# EAGLE board PLAN2 FINAL2 (EAGLE 9.3.0)
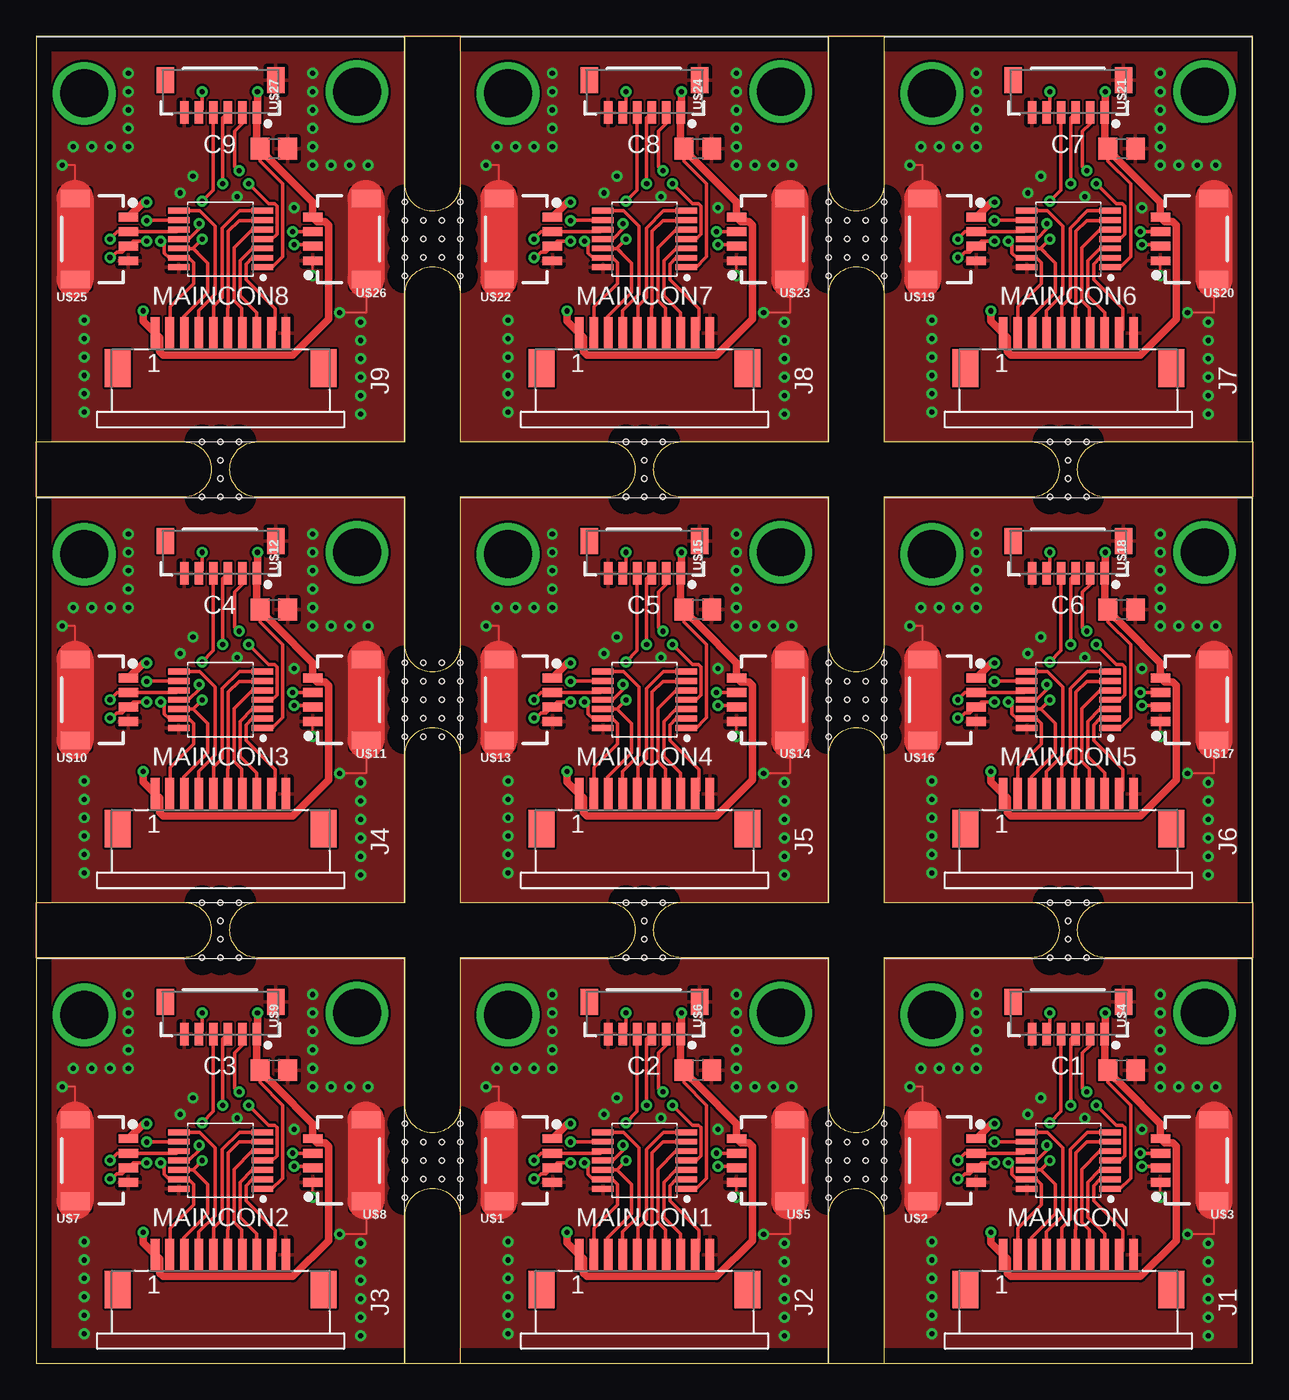
[diagram p0: board, top side]
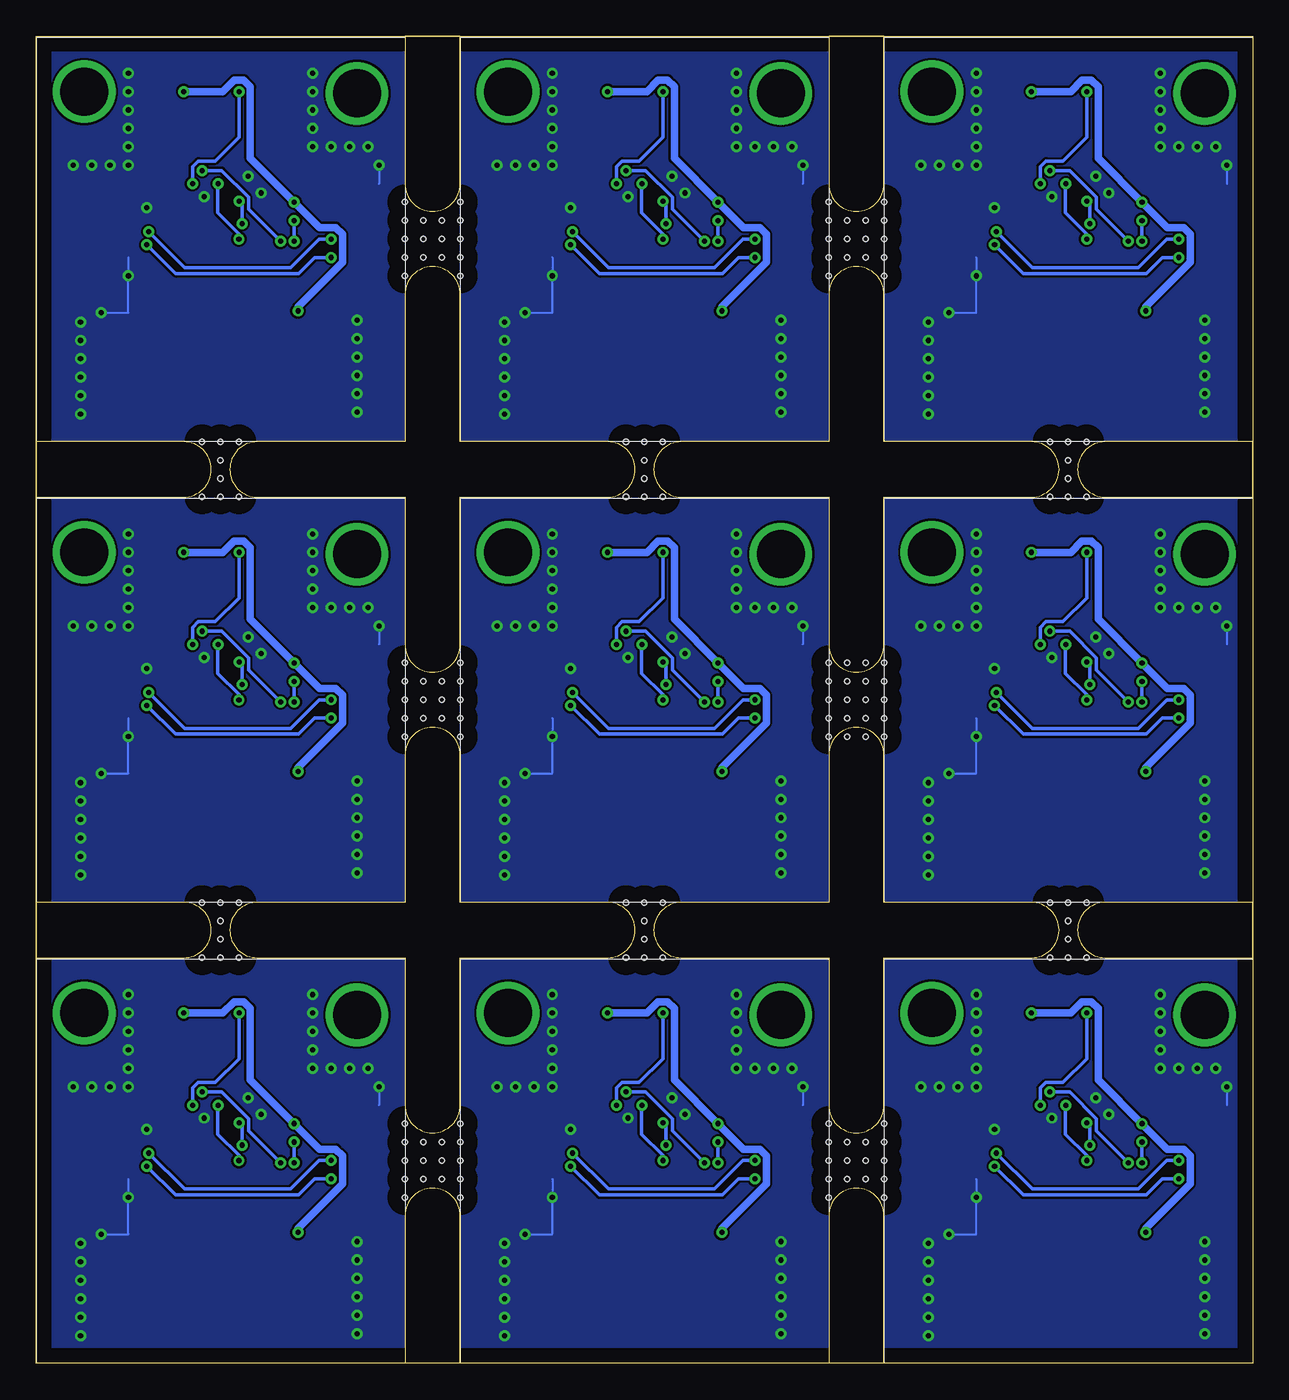
[diagram p1: board, bottom side, seen from below]

Size 83.82 x 91.44 mm. Coordinates in mm from the lower left corner, seen from the top.
Outline: 0,0 83.82,0 83.82,91.44 0,91.44 0,0
Copper layers (1*16): Top 0.035mm / dielectric 1.5mm / Bottom 0.035mm
Design rules "default": minimum track width 6mil, minimum drill 0.35mm, track to track 6mil, track to pad 6mil, pad to pad 6mil, via to via 6mil, smd to smd 6mil, copper to edge 40mil, drill to drill 6mil, minimum pad ring 10mil, minimum via ring 8mil, stop-mask expansion 4mil, vias tented up to drill 0mil, thermal gap 10mil
Holes 0.35 mm at 54.61,48.26 54.61,46.99 54.61,45.72 54.61,44.45 54.61,43.18 58.42,48.26 58.42,46.99 58.42,45.72 58.42,44.45 58.42,43.18 55.88,46.99 55.88,45.72 55.88,44.45 57.15,46.99 57.15,45.72 57.15,44.45 54.61,16.51 54.61,15.24 54.61,13.97 54.61,12.7 54.61,11.43 55.88,15.24 55.88,13.97 55.88,12.7 57.15,15.24 57.15,13.97 57.15,12.7 58.42,16.51 58.42,15.24 58.42,13.97 58.42,12.7 58.42,11.43 25.4,16.51 25.4,15.24 25.4,13.97 25.4,12.7 25.4,11.43 26.67,15.24 26.67,13.97 26.67,12.7 27.94,15.24 27.94,13.97 27.94,12.7 29.21,16.51 29.21,15.24 29.21,13.97 29.21,12.7 29.21,11.43 11.43,31.75 12.7,31.75 13.97,31.75 12.7,30.48 12.7,29.21 11.43,27.94 12.7,27.94 13.97,27.94 40.64,31.75 41.91,31.75 43.18,31.75 41.91,30.48 41.91,29.21 40.64,27.94 41.91,27.94 43.18,27.94 69.85,31.75 71.12,31.75 72.39,31.75 71.12,30.48 71.12,29.21 69.85,27.94 71.12,27.94 72.39,27.94 25.4,48.26 25.4,46.99 25.4,45.72 25.4,44.45 25.4,43.18 26.67,48.26 26.67,46.99 26.67,45.72 26.67,44.45 26.67,43.18 27.94,48.26 27.94,46.99 27.94,45.72 27.94,44.45 27.94,43.18 29.21,48.26 29.21,46.99 29.21,45.72 29.21,44.45 29.21,43.18 25.4,80.01 25.4,78.74 25.4,77.47 25.4,76.2 25.4,74.93 26.67,78.74 26.67,77.47 26.67,76.2 27.94,78.74 27.94,77.47 27.94,76.2 29.21,80.01 29.21,78.74 29.21,77.47 29.21,76.2 29.21,74.93 54.61,80.01 54.61,78.74 54.61,77.47 54.61,76.2 54.61,74.93 55.88,78.74 55.88,77.47 55.88,76.2 57.15,78.74 57.15,77.47 57.15,76.2 58.42,80.01 58.42,78.74 58.42,77.47 58.42,76.2 58.42,74.93 11.43,63.5 12.7,63.5 13.97,63.5 12.7,62.23 12.7,60.96 11.43,59.69 12.7,59.69 13.97,59.69 40.64,63.5 41.91,63.5 43.18,63.5 41.91,62.23 41.91,60.96 40.64,59.69 41.91,59.69 43.18,59.69 69.85,63.5 71.12,63.5 72.39,63.5 71.12,62.23 71.12,60.96 69.85,59.69 71.12,59.69 72.39,59.69
Milling: 80 lines

## Footprints (pad centres in the part's own frame; a part is rotated, then mirrored left to right if it is on the bottom)
C0805 = smd 1.3 x 1.5: 1 -0.95,0; 2 0.95,0
68611014422 = smd 0.6 x 2.2: 1 -4.5,2.4; 2 -3.5,2.4; 3 -2.5,2.4; 4 -1.5,2.4; 5 -0.5,2.4; 6 0.5,2.4; 7 1.5,2.4; 8 2.5,2.4; 9 3.5,2.4; 10 4.5,2.4 | smd 1.8 x 2.6: Z1 -7.1,0; Z2 7.1,0
14-TSSOP = smd 1.469 x 0.407: 1 -2.871,1.95; 2 -2.871,1.3; 3 -2.871,0.65; 4 -2.871,0; 5 -2.871,-0.65; 6 -2.871,-1.3; 7 -2.871,-1.95; 8 2.871,-1.95; 9 2.871,-1.3; 10 2.871,-0.65; 11 2.871,0; 12 2.871,0.65; 13 2.871,1.3; 14 2.871,1.95
JST_ZH_4PIN = smd 0.6 x 1.35: 1 -1.5,0; 2 -0.5,0; 3 0.5,0; 4 1.5,0 | smd 1.2 x 2: NC1 2.8,-3.675; NC2 -2.8,-3.675
JST_ZH_6PIN = smd 0.6 x 1.55: 1 -2.5,1.45; 2 -1.5,1.45; 3 -0.5,1.45; 4 0.5,1.45; 5 1.5,1.45; 6 2.5,1.45 | smd 1.2 x 1.8: P$1 -3.8,-0.775; P$2 3.8,-0.775

## Placement (x,y rotation side)
C1  47u  [C0805]  74.8,20.19 0 top
C2  47u  [C0805]  45.59,20.19 0 top
C3  47u  [C0805]  16.38,20.19 0 top
C4  47u  [C0805]  16.38,51.94 0 top
C5  47u  [C0805]  45.59,51.94 0 top
C6  47u  [C0805]  74.8,51.94 0 top
C7  47u  [C0805]  74.8,83.69 0 top
C8  47u  [C0805]  45.59,83.69 0 top
C9  47u  [C0805]  16.38,83.69 0 top
J1  analog  [68611014422]  71.12,5.08 0 top
J2  analog  [68611014422]  41.91,5.08 0 top
J3  analog  [68611014422]  12.7,5.08 0 top
J4  analog  [68611014422]  12.7,36.83 0 top
J5  analog  [68611014422]  41.91,36.83 0 top
J6  analog  [68611014422]  71.12,36.83 0 top
J7  analog  [68611014422]  71.12,68.58 0 top
J8  analog  [68611014422]  41.91,68.58 0 top
J9  analog  [68611014422]  12.7,68.58 0 top
MAINCON  PIC16F18424  [14-TSSOP]  71.12,13.97 180 top
MAINCON1  PIC16F18424  [14-TSSOP]  41.91,13.97 180 top
MAINCON2  PIC16F18424  [14-TSSOP]  12.7,13.97 180 top
MAINCON3  PIC16F18424  [14-TSSOP]  12.7,45.72 180 top
MAINCON4  PIC16F18424  [14-TSSOP]  41.91,45.72 180 top
MAINCON5  PIC16F18424  [14-TSSOP]  71.12,45.72 180 top
MAINCON6  PIC16F18424  [14-TSSOP]  71.12,77.47 180 top
MAINCON7  PIC16F18424  [14-TSSOP]  41.91,77.47 180 top
MAINCON8  PIC16F18424  [14-TSSOP]  12.7,77.47 180 top
U$1  IIC1  [JST_ZH_4PIN]  35.56,13.97 270 top
U$2  IIC1  [JST_ZH_4PIN]  64.77,13.97 270 top
U$3  IIC2  [JST_ZH_4PIN]  77.47,13.97 90 top
U$4  programming  [JST_ZH_6PIN]  71.12,24.13 180 top
U$5  IIC2  [JST_ZH_4PIN]  48.26,13.97 90 top
U$6  programming  [JST_ZH_6PIN]  41.91,24.13 180 top
U$7  IIC1  [JST_ZH_4PIN]  6.35,13.97 270 top
U$8  IIC2  [JST_ZH_4PIN]  19.05,13.97 90 top
U$9  programming  [JST_ZH_6PIN]  12.7,24.13 180 top
U$10  IIC1  [JST_ZH_4PIN]  6.35,45.72 270 top
U$11  IIC2  [JST_ZH_4PIN]  19.05,45.72 90 top
U$12  programming  [JST_ZH_6PIN]  12.7,55.88 180 top
U$13  IIC1  [JST_ZH_4PIN]  35.56,45.72 270 top
U$14  IIC2  [JST_ZH_4PIN]  48.26,45.72 90 top
U$15  programming  [JST_ZH_6PIN]  41.91,55.88 180 top
U$16  IIC1  [JST_ZH_4PIN]  64.77,45.72 270 top
U$17  IIC2  [JST_ZH_4PIN]  77.47,45.72 90 top
U$18  programming  [JST_ZH_6PIN]  71.12,55.88 180 top
U$19  IIC1  [JST_ZH_4PIN]  64.77,77.47 270 top
U$20  IIC2  [JST_ZH_4PIN]  77.47,77.47 90 top
U$21  programming  [JST_ZH_6PIN]  71.12,87.63 180 top
U$22  IIC1  [JST_ZH_4PIN]  35.56,77.47 270 top
U$23  IIC2  [JST_ZH_4PIN]  48.26,77.47 90 top
U$24  programming  [JST_ZH_6PIN]  41.91,87.63 180 top
U$25  IIC1  [JST_ZH_4PIN]  6.35,77.47 270 top
U$26  IIC2  [JST_ZH_4PIN]  19.05,77.47 90 top
U$27  programming  [JST_ZH_6PIN]  12.7,87.63 180 top

## Library data of the parts
C1-C9 = rcl; SPICEPREFIX: C
J1-J9 = Wurth_Elektronik_Electromechanic_FPC_Connectors_&_Flat_Flexible_Cable_rev18c
MAINCON MAINCON1-MAINCON8 = ORBiT-IC-PIC
U$1-U$27 = ORBiT-con-JST

## Nets
+5V: C1.1 J1.1 MAINCON.1 U$2.1 U$3.4 U$4.1
+5V1: C2.1 J2.1 MAINCON1.1 U$1.1 U$5.4 U$6.1
+5V2: C3.1 J3.1 MAINCON2.1 U$7.1 U$8.4 U$9.1
+5V3: C4.1 J4.1 MAINCON3.1 U$10.1 U$11.4 U$12.1
+5V4: C5.1 J5.1 MAINCON4.1 U$13.1 U$14.4 U$15.1
+5V5: C6.1 J6.1 MAINCON5.1 U$16.1 U$17.4 U$18.1
+5V6: C7.1 J7.1 MAINCON6.1 U$19.1 U$20.4 U$21.1
+5V7: C8.1 J8.1 MAINCON7.1 U$22.1 U$23.4 U$24.1
+5V8: C9.1 J9.1 MAINCON8.1 U$25.1 U$26.4 U$27.1
AD1: J1.2 MAINCON.13 U$4.2
AD2: J1.3 MAINCON.12 U$4.3
AD3: J1.4 MAINCON.8
AD4: J1.5 MAINCON.7
AD5: J1.6 MAINCON.6
AD6: J1.7 MAINCON.5
AD7: J1.8 MAINCON.3
AD8: J1.9 MAINCON.2
AD9: J2.4 MAINCON1.8
AD10: J2.5 MAINCON1.7
AD11: J2.6 MAINCON1.6
AD12: J2.7 MAINCON1.5
AD13: J2.8 MAINCON1.3
AD14: J2.9 MAINCON1.2
AD15: J2.2 MAINCON1.13 U$6.2
AD16: J2.3 MAINCON1.12 U$6.3
AD17: J3.4 MAINCON2.8
AD18: J3.5 MAINCON2.7
AD19: J3.6 MAINCON2.6
AD20: J3.7 MAINCON2.5
AD21: J3.8 MAINCON2.3
AD22: J3.9 MAINCON2.2
AD23: J3.2 MAINCON2.13 U$9.2
AD24: J3.3 MAINCON2.12 U$9.3
AD25: J4.4 MAINCON3.8
AD26: J4.5 MAINCON3.7
AD27: J4.6 MAINCON3.6
AD28: J4.7 MAINCON3.5
AD29: J4.8 MAINCON3.3
AD30: J4.9 MAINCON3.2
AD31: J4.2 MAINCON3.13 U$12.2
AD32: J4.3 MAINCON3.12 U$12.3
AD33: J5.4 MAINCON4.8
AD34: J5.5 MAINCON4.7
AD35: J5.6 MAINCON4.6
AD36: J5.7 MAINCON4.5
AD37: J5.8 MAINCON4.3
AD38: J5.9 MAINCON4.2
AD39: J5.2 MAINCON4.13 U$15.2
AD40: J5.3 MAINCON4.12 U$15.3
AD41: J6.4 MAINCON5.8
AD42: J6.5 MAINCON5.7
AD43: J6.6 MAINCON5.6
AD44: J6.7 MAINCON5.5
AD45: J6.8 MAINCON5.3
AD46: J6.9 MAINCON5.2
AD47: J6.2 MAINCON5.13 U$18.2
AD48: J6.3 MAINCON5.12 U$18.3
AD49: J7.4 MAINCON6.8
AD50: J7.5 MAINCON6.7
AD51: J7.6 MAINCON6.6
AD52: J7.7 MAINCON6.5
AD53: J7.8 MAINCON6.3
AD54: J7.9 MAINCON6.2
AD55: J7.2 MAINCON6.13 U$21.2
AD56: J7.3 MAINCON6.12 U$21.3
AD57: J8.4 MAINCON7.8
AD58: J8.5 MAINCON7.7
AD59: J8.6 MAINCON7.6
AD60: J8.7 MAINCON7.5
AD61: J8.8 MAINCON7.3
AD62: J8.9 MAINCON7.2
AD63: J8.2 MAINCON7.13 U$24.2
AD64: J8.3 MAINCON7.12 U$24.3
AD65: J9.4 MAINCON8.8
AD66: J9.5 MAINCON8.7
AD67: J9.6 MAINCON8.6
AD68: J9.7 MAINCON8.5
AD69: J9.8 MAINCON8.3
AD70: J9.9 MAINCON8.2
AD71: J9.2 MAINCON8.13 U$27.2
AD72: J9.3 MAINCON8.12 U$27.3
GND: C1.2 J1.10 MAINCON.14 U$2.4 U$2.NC1 U$2.NC2 U$3.1 U$3.NC1 U$3.NC2 U$4.6 U$4.P$1
GND1: C2.2 J2.10 MAINCON1.14 U$1.4 U$1.NC1 U$1.NC2 U$5.1 U$5.NC1 U$5.NC2 U$6.6 U$6.P$1
GND2: C3.2 J3.10 MAINCON2.14 U$7.4 U$7.NC1 U$7.NC2 U$8.1 U$8.NC1 U$8.NC2 U$9.6 U$9.P$1
GND3: C4.2 J4.10 MAINCON3.14 U$10.4 U$10.NC1 U$10.NC2 U$11.1 U$11.NC1 U$11.NC2 U$12.6 U$12.P$1
GND4: C5.2 J5.10 MAINCON4.14 U$13.4 U$13.NC1 U$13.NC2 U$14.1 U$14.NC1 U$14.NC2 U$15.6 U$15.P$1
GND5: C6.2 J6.10 MAINCON5.14 U$16.4 U$16.NC1 U$16.NC2 U$17.1 U$17.NC1 U$17.NC2 U$18.6 U$18.P$1
GND6: C7.2 J7.10 MAINCON6.14 U$19.4 U$19.NC1 U$19.NC2 U$20.1 U$20.NC1 U$20.NC2 U$21.6 U$21.P$1
GND7: C8.2 J8.10 MAINCON7.14 U$22.4 U$22.NC1 U$22.NC2 U$23.1 U$23.NC1 U$23.NC2 U$24.6 U$24.P$1
GND8: C9.2 J9.10 MAINCON8.14 U$25.4 U$25.NC1 U$25.NC2 U$26.1 U$26.NC1 U$26.NC2 U$27.6 U$27.P$1
N$3: MAINCON1.11 U$6.4
N$4: MAINCON1.4 U$6.5
N$7: MAINCON.11 U$4.4
N$8: MAINCON.4 U$4.5
N$9: MAINCON2.11 U$9.4
N$10: MAINCON2.4 U$9.5
N$13: MAINCON3.11 U$12.4
N$14: MAINCON3.4 U$12.5
N$17: MAINCON4.11 U$15.4
N$18: MAINCON4.4 U$15.5
N$21: MAINCON5.11 U$18.4
N$22: MAINCON5.4 U$18.5
N$25: MAINCON6.11 U$21.4
N$26: MAINCON6.4 U$21.5
N$29: MAINCON7.11 U$24.4
N$30: MAINCON7.4 U$24.5
N$33: MAINCON8.11 U$27.4
N$34: MAINCON8.4 U$27.5
SCL: MAINCON.10 U$2.2 U$3.3
SCL1: MAINCON1.10 U$1.2 U$5.3
SCL2: MAINCON2.10 U$7.2 U$8.3
SCL3: MAINCON3.10 U$10.2 U$11.3
SCL4: MAINCON4.10 U$13.2 U$14.3
SCL5: MAINCON5.10 U$16.2 U$17.3
SCL6: MAINCON6.10 U$19.2 U$20.3
SCL7: MAINCON7.10 U$22.2 U$23.3
SCL8: MAINCON8.10 U$25.2 U$26.3
SDA: MAINCON.9 U$2.3 U$3.2
SDA1: MAINCON1.9 U$1.3 U$5.2
SDA2: MAINCON2.9 U$7.3 U$8.2
SDA3: MAINCON3.9 U$10.3 U$11.2
SDA4: MAINCON4.9 U$13.3 U$14.2
SDA5: MAINCON5.9 U$16.3 U$17.2
SDA6: MAINCON6.9 U$19.3 U$20.2
SDA7: MAINCON7.9 U$22.3 U$23.2
SDA8: MAINCON8.9 U$25.3 U$26.2

## Tracks (layer width: path | path; a pad name or v marks a point on that pad's centre or on a via)
+5V  (via drill 0.35)
  Top 0.254: MAINCON.1 74.08,11.93 74.59,11.93 75.41,12.76 75.41,17.78 73.85,19.34 C1.1
  Top 0.508: U$2.1 65.81,16.51 v66.04,16.51 | v73.66,24.13 73.66,22.72 U$4.1 73.62,20.14 73.85,19.91 C1.1 73.85,20.12 74.02,19.95 74.94,19.04 77.47,16.51 U$3.4 77.76,15.18 78.31,15.18 78.55,14.94 78.55,8.44 76.09,5.97 67.15,5.97 66.91,6.21 66.91,7.19 J1.1 65.79,8.31 v65.79,9.02
  Bottom 0.508: v73.66,24.13 70.96,24.13 70.17,24.91 69.53,24.91 69.06,24.45 69.06,19.54 v66.04,16.51 64.28,14.76 63.17,14.76 62.72,14.29 62.72,12.38 65.79,9.3 v65.79,9.02
+5V1  (via drill 0.35)
  Top 0.254: MAINCON1.1 44.87,11.93 45.38,11.93 46.2,12.76 46.2,17.78 44.64,19.34 C2.1
  Top 0.508: U$1.1 36.6,16.51 v36.83,16.51 | v44.45,24.13 44.45,22.72 U$6.1 44.41,20.14 44.64,19.91 C2.1 44.64,20.12 44.81,19.95 45.73,19.04 48.26,16.51 U$5.4 48.55,15.18 49.1,15.18 49.34,14.94 49.34,8.44 46.88,5.97 37.94,5.97 37.7,6.21 37.7,7.19 J2.1 36.58,8.31 v36.58,9.02
  Bottom 0.508: v44.45,24.13 41.75,24.13 40.97,24.91 40.31,24.91 39.85,24.45 39.85,19.54 v36.83,16.51 35.08,14.76 33.97,14.76 33.51,14.29 33.51,12.38 36.58,9.3 v36.58,9.02
+5V2  (via drill 0.35)
  Top 0.254: MAINCON2.1 15.66,11.93 16.17,11.93 16.99,12.76 16.99,17.78 15.43,19.34 C3.1
  Top 0.508: U$7.1 7.39,16.51 v7.62,16.51 | v15.24,24.13 15.24,22.72 U$9.1 15.2,20.14 15.43,19.91 C3.1 15.43,20.12 15.6,19.95 16.52,19.04 19.05,16.51 U$8.4 19.34,15.18 19.89,15.18 20.13,14.94 20.13,8.44 17.67,5.97 8.73,5.97 8.49,6.21 8.49,7.19 J3.1 7.37,8.31 v7.37,9.02
  Bottom 0.508: v15.24,24.13 12.54,24.13 11.76,24.91 11.11,24.91 10.64,24.45 10.64,19.54 v7.62,16.51 5.87,14.76 4.75,14.76 4.29,14.29 4.29,12.38 7.37,9.3 v7.37,9.02
+5V3  (via drill 0.35)
  Top 0.254: MAINCON3.1 15.66,43.68 16.17,43.68 16.99,44.51 16.99,49.53 15.43,51.09 C4.1
  Top 0.508: U$10.1 7.39,48.26 v7.62,48.26 | v15.24,55.88 15.24,54.47 U$12.1 15.2,51.89 15.43,51.66 C4.1 15.43,51.87 15.6,51.7 16.52,50.79 19.05,48.26 U$11.4 19.34,46.93 19.89,46.93 20.13,46.69 20.13,40.19 17.67,37.72 8.73,37.72 8.49,37.96 8.49,38.94 J4.1 7.37,40.06 v7.37,40.77
  Bottom 0.508: v15.24,55.88 12.54,55.88 11.76,56.66 11.11,56.66 10.64,56.2 10.64,51.28 v7.62,48.26 5.87,46.51 4.75,46.51 4.29,46.05 4.29,44.12 7.37,41.05 v7.37,40.77
+5V4  (via drill 0.35)
  Top 0.254: MAINCON4.1 44.87,43.68 45.38,43.68 46.2,44.51 46.2,49.53 44.64,51.09 C5.1
  Top 0.508: U$13.1 36.6,48.26 v36.83,48.26 | v44.45,55.88 44.45,54.47 U$15.1 44.41,51.89 44.64,51.66 C5.1 44.64,51.87 44.81,51.7 45.73,50.79 48.26,48.26 U$14.4 48.55,46.93 49.1,46.93 49.34,46.69 49.34,40.19 46.88,37.72 37.94,37.72 37.7,37.96 37.7,38.94 J5.1 36.58,40.06 v36.58,40.77
  Bottom 0.508: v44.45,55.88 41.75,55.88 40.97,56.66 40.31,56.66 39.85,56.2 39.85,51.28 v36.83,48.26 35.08,46.51 33.97,46.51 33.51,46.05 33.51,44.12 36.58,41.05 v36.58,40.77
+5V5  (via drill 0.35)
  Top 0.254: MAINCON5.1 74.08,43.68 74.59,43.68 75.41,44.51 75.41,49.53 73.85,51.09 C6.1
  Top 0.508: U$16.1 65.81,48.26 v66.04,48.26 | v73.66,55.88 73.66,54.47 U$18.1 73.62,51.89 73.85,51.66 C6.1 73.85,51.87 74.02,51.7 74.94,50.79 77.47,48.26 U$17.4 77.76,46.93 78.31,46.93 78.55,46.69 78.55,40.19 76.09,37.72 67.15,37.72 66.91,37.96 66.91,38.94 J6.1 65.79,40.06 v65.79,40.77
  Bottom 0.508: v73.66,55.88 70.96,55.88 70.17,56.66 69.53,56.66 69.06,56.2 69.06,51.28 v66.04,48.26 64.28,46.51 63.17,46.51 62.72,46.05 62.72,44.12 65.79,41.05 v65.79,40.77
+5V6  (via drill 0.35)
  Top 0.254: MAINCON6.1 74.08,75.43 74.59,75.43 75.41,76.26 75.41,81.28 73.85,82.84 C7.1
  Top 0.508: U$19.1 65.81,80.01 v66.04,80.01 | v73.66,87.63 73.66,86.22 U$21.1 73.62,83.64 73.85,83.41 C7.1 73.85,83.62 74.02,83.45 74.94,82.54 77.47,80.01 U$20.4 77.76,78.68 78.31,78.68 78.55,78.44 78.55,71.94 76.09,69.47 67.15,69.47 66.91,69.71 66.91,70.69 J7.1 65.79,71.81 v65.79,72.52
  Bottom 0.508: v73.66,87.63 70.96,87.63 70.17,88.42 69.53,88.42 69.06,87.95 69.06,83.03 v66.04,80.01 64.28,78.25 63.17,78.25 62.72,77.8 62.72,75.88 65.79,72.8 v65.79,72.52
+5V7  (via drill 0.35)
  Top 0.254: MAINCON7.1 44.87,75.43 45.38,75.43 46.2,76.26 46.2,81.28 44.64,82.84 C8.1
  Top 0.508: U$22.1 36.6,80.01 v36.83,80.01 | v44.45,87.63 44.45,86.22 U$24.1 44.41,83.64 44.64,83.41 C8.1 44.64,83.62 44.81,83.45 45.73,82.54 48.26,80.01 U$23.4 48.55,78.68 49.1,78.68 49.34,78.44 49.34,71.94 46.88,69.47 37.94,69.47 37.7,69.71 37.7,70.69 J8.1 36.58,71.81 v36.58,72.52
  Bottom 0.508: v44.45,87.63 41.75,87.63 40.97,88.42 40.31,88.42 39.85,87.95 39.85,83.03 v36.83,80.01 35.08,78.25 33.97,78.25 33.51,77.8 33.51,75.88 36.58,72.8 v36.58,72.52
+5V8  (via drill 0.35)
  Top 0.254: MAINCON8.1 15.66,75.43 16.17,75.43 16.99,76.26 16.99,81.28 15.43,82.84 C9.1
  Top 0.508: U$25.1 7.39,80.01 v7.62,80.01 | v15.24,87.63 15.24,86.22 U$27.1 15.2,83.64 15.43,83.41 C9.1 15.43,83.62 15.6,83.45 16.52,82.54 19.05,80.01 U$26.4 19.34,78.68 19.89,78.68 20.13,78.44 20.13,71.94 17.67,69.47 8.73,69.47 8.49,69.71 8.49,70.69 J9.1 7.37,71.81 v7.37,72.52
  Bottom 0.508: v15.24,87.63 12.54,87.63 11.76,88.42 11.11,88.42 10.64,87.95 10.64,83.03 v7.62,80.01 5.87,78.25 4.75,78.25 4.29,77.8 4.29,75.88 7.37,72.8 v7.37,72.52
AD1  (via drill 0.35)
  Top 0.254: J1.2 67.66,7.52 67.66,9.31 69.26,10.91 69.26,12.34 68.93,12.67 MAINCON.13 67.57,12.67 67.23,13 67.23,13.68 67.11,13.81 v66.98,13.81 | v72.39,18.69 72.34,18.69 72.09,18.94 72.09,21.38 72.62,21.91 U$4.2
  Bottom 0.254: v66.98,13.81 69.19,16.02 69.19,16.85 71.03,18.69 v72.39,18.69
AD2  (via drill 0.35)
  Top 0.254: 69.85,12.7 69.23,13.32 68.58,13.32 MAINCON.12 | 69.85,12.7 69.22,13.33 v69.86,13.96 | 69.85,12.7 70.23,12.32 70.23,10.29 68.58,8.64 68.58,7.52 J1.3 | v71.28,17.78 71.28,22.34 U$4.3
  Bottom 0.254: v69.86,13.96 69.86,14.32 71.31,15.77 71.31,17.78 v71.28,17.78
AD3
  Top 0.254: J1.4 69.62,9.04 70.74,10.16 70.74,14.86 69.68,15.92 MAINCON.8
AD4
  Top 0.254: J1.5 70.66,7.52 70.66,9.33 71.25,9.92 71.25,14.73 72.44,15.92 MAINCON.7
AD5
  Top 0.254: MAINCON.6 73.96,15.24 72.39,15.24 71.65,14.5 71.65,9.24 71.62,9.21 J1.6
AD6
  Top 0.254: J1.7 72.58,7.52 72.58,9.2 72.06,9.72 72.06,13.37 73.31,14.62 MAINCON.5
AD7
  Top 0.254: J1.8 73.62,8.91 72.47,10.06 72.47,12.48 73.31,13.32 MAINCON.3
AD8
  Top 0.254: MAINCON.2 73.31,12.67 72.87,12.23 72.87,11.18 74.87,9.18 74.87,7.73 J1.9
AD9
  Top 0.254: J2.4 40.41,9.04 41.53,10.16 41.53,14.86 40.47,15.92 MAINCON1.8
AD10
  Top 0.254: J2.5 41.45,7.52 41.45,9.33 42.04,9.92 42.04,14.73 43.23,15.92 MAINCON1.7
AD11
  Top 0.254: MAINCON1.6 44.75,15.24 43.18,15.24 42.44,14.5 42.44,9.24 42.41,9.21 J2.6
AD12
  Top 0.254: J2.7 43.37,7.52 43.37,9.2 42.85,9.72 42.85,13.37 44.1,14.62 MAINCON1.5
AD13
  Top 0.254: J2.8 44.41,8.91 43.26,10.06 43.26,12.48 44.1,13.32 MAINCON1.3
AD14
  Top 0.254: MAINCON1.2 44.1,12.67 43.66,12.23 43.66,11.18 45.66,9.18 45.66,7.73 J2.9
AD15  (via drill 0.35)
  Top 0.254: J2.2 38.45,7.52 38.45,9.31 40.05,10.91 40.05,12.34 39.72,12.67 MAINCON1.13 38.36,12.67 38.02,13 38.02,13.68 37.9,13.81 v37.77,13.81 | v43.18,18.69 43.13,18.69 42.88,18.94 42.88,21.38 43.41,21.91 U$6.2
  Bottom 0.254: v37.77,13.81 39.98,16.02 39.98,16.85 41.82,18.69 v43.18,18.69
AD16  (via drill 0.35)
  Top 0.254: 40.64,12.7 40.02,13.32 39.37,13.32 MAINCON1.12 | 40.64,12.7 40.01,13.33 v40.65,13.96 | 40.64,12.7 41.02,12.32 41.02,10.29 39.37,8.64 39.37,7.52 J2.3 | v42.07,17.78 42.07,22.34 U$6.3
  Bottom 0.254: v40.65,13.96 40.65,14.32 42.1,15.77 42.1,17.78 v42.07,17.78
AD17
  Top 0.254: J3.4 11.2,9.04 12.32,10.16 12.32,14.86 11.26,15.92 MAINCON2.8
AD18
  Top 0.254: J3.5 12.24,7.52 12.24,9.33 12.83,9.92 12.83,14.73 14.02,15.92 MAINCON2.7
AD19
  Top 0.254: MAINCON2.6 15.54,15.24 13.97,15.24 13.23,14.5 13.23,9.24 13.2,9.21 J3.6
AD20
  Top 0.254: J3.7 14.16,7.52 14.16,9.2 13.64,9.72 13.64,13.37 14.89,14.62 MAINCON2.5
AD21
  Top 0.254: J3.8 15.2,8.91 14.05,10.06 14.05,12.48 14.89,13.32 MAINCON2.3
AD22
  Top 0.254: MAINCON2.2 14.89,12.67 14.45,12.23 14.45,11.18 16.45,9.18 16.45,7.73 J3.9
AD23  (via drill 0.35)
  Top 0.254: J3.2 9.24,7.52 9.24,9.31 10.84,10.91 10.84,12.34 10.51,12.67 MAINCON2.13 9.15,12.67 8.81,13 8.81,13.68 8.69,13.81 v8.56,13.81 | v13.97,18.69 13.92,18.69 13.67,18.94 13.67,21.38 14.2,21.91 U$9.2
  Bottom 0.254: v8.56,13.81 10.77,16.02 10.77,16.85 12.61,18.69 v13.97,18.69
AD24  (via drill 0.35)
  Top 0.254: 11.43,12.7 10.81,13.32 10.16,13.32 MAINCON2.12 | 11.43,12.7 10.8,13.33 v11.44,13.96 | 11.43,12.7 11.81,12.32 11.81,10.29 10.16,8.64 10.16,7.52 J3.3 | v12.86,17.78 12.86,22.34 U$9.3
  Bottom 0.254: v11.44,13.96 11.44,14.32 12.89,15.77 12.89,17.78 v12.86,17.78
AD25
  Top 0.254: J4.4 11.2,40.79 12.32,41.91 12.32,46.61 11.26,47.67 MAINCON3.8
AD26
  Top 0.254: J4.5 12.24,39.27 12.24,41.08 12.83,41.67 12.83,46.48 14.02,47.67 MAINCON3.7
AD27
  Top 0.254: MAINCON3.6 15.54,46.99 13.97,46.99 13.23,46.25 13.23,40.99 13.2,40.96 J4.6
AD28
  Top 0.254: J4.7 14.16,39.27 14.16,40.95 13.64,41.47 13.64,45.12 14.89,46.37 MAINCON3.5
AD29
  Top 0.254: J4.8 15.2,40.66 14.05,41.81 14.05,44.23 14.89,45.07 MAINCON3.3
AD30
  Top 0.254: MAINCON3.2 14.89,44.42 14.45,43.98 14.45,42.93 16.45,40.92 16.45,39.48 J4.9
AD31  (via drill 0.35)
  Top 0.254: J4.2 9.24,39.27 9.24,41.06 10.84,42.66 10.84,44.09 10.51,44.42 MAINCON3.13 9.15,44.42 8.81,44.75 8.81,45.43 8.69,45.56 v8.56,45.56 | v13.97,50.44 13.92,50.44 13.67,50.69 13.67,53.13 14.2,53.66 U$12.2
  Bottom 0.254: v8.56,45.56 10.77,47.77 10.77,48.6 12.61,50.44 v13.97,50.44
AD32  (via drill 0.35)
  Top 0.254: 11.43,44.45 10.81,45.07 10.16,45.07 MAINCON3.12 | 11.43,44.45 10.8,45.08 v11.44,45.71 | 11.43,44.45 11.81,44.07 11.81,42.04 10.16,40.39 10.16,39.27 J4.3 | v12.86,49.53 12.86,54.09 U$12.3
  Bottom 0.254: v11.44,45.71 11.44,46.07 12.89,47.52 12.89,49.53 v12.86,49.53
AD33
  Top 0.254: J5.4 40.41,40.79 41.53,41.91 41.53,46.61 40.47,47.67 MAINCON4.8
AD34
  Top 0.254: J5.5 41.45,39.27 41.45,41.08 42.04,41.67 42.04,46.48 43.23,47.67 MAINCON4.7
AD35
  Top 0.254: MAINCON4.6 44.75,46.99 43.18,46.99 42.44,46.25 42.44,40.99 42.41,40.96 J5.6
AD36
  Top 0.254: J5.7 43.37,39.27 43.37,40.95 42.85,41.47 42.85,45.12 44.1,46.37 MAINCON4.5
AD37
  Top 0.254: J5.8 44.41,40.66 43.26,41.81 43.26,44.23 44.1,45.07 MAINCON4.3
AD38
  Top 0.254: MAINCON4.2 44.1,44.42 43.66,43.98 43.66,42.93 45.66,40.92 45.66,39.48 J5.9
AD39  (via drill 0.35)
  Top 0.254: J5.2 38.45,39.27 38.45,41.06 40.05,42.66 40.05,44.09 39.72,44.42 MAINCON4.13 38.36,44.42 38.02,44.75 38.02,45.43 37.9,45.56 v37.77,45.56 | v43.18,50.44 43.13,50.44 42.88,50.69 42.88,53.13 43.41,53.66 U$15.2
  Bottom 0.254: v37.77,45.56 39.98,47.77 39.98,48.6 41.82,50.44 v43.18,50.44
AD40  (via drill 0.35)
  Top 0.254: 40.64,44.45 40.02,45.07 39.37,45.07 MAINCON4.12 | 40.64,44.45 40.01,45.08 v40.65,45.71 | 40.64,44.45 41.02,44.07 41.02,42.04 39.37,40.39 39.37,39.27 J5.3 | v42.07,49.53 42.07,54.09 U$15.3
  Bottom 0.254: v40.65,45.71 40.65,46.07 42.1,47.52 42.1,49.53 v42.07,49.53
AD41
  Top 0.254: J6.4 69.62,40.79 70.74,41.91 70.74,46.61 69.68,47.67 MAINCON5.8
AD42
  Top 0.254: J6.5 70.66,39.27 70.66,41.08 71.25,41.67 71.25,46.48 72.44,47.67 MAINCON5.7
AD43
  Top 0.254: MAINCON5.6 73.96,46.99 72.39,46.99 71.65,46.25 71.65,40.99 71.62,40.96 J6.6
AD44
  Top 0.254: J6.7 72.58,39.27 72.58,40.95 72.06,41.47 72.06,45.12 73.31,46.37 MAINCON5.5
AD45
  Top 0.254: J6.8 73.62,40.66 72.47,41.81 72.47,44.23 73.31,45.07 MAINCON5.3
AD46
  Top 0.254: MAINCON5.2 73.31,44.42 72.87,43.98 72.87,42.93 74.87,40.92 74.87,39.48 J6.9
AD47  (via drill 0.35)
  Top 0.254: J6.2 67.66,39.27 67.66,41.06 69.26,42.66 69.26,44.09 68.93,44.42 MAINCON5.13 67.57,44.42 67.23,44.75 67.23,45.43 67.11,45.56 v66.98,45.56 | v72.39,50.44 72.34,50.44 72.09,50.69 72.09,53.13 72.62,53.66 U$18.2
  Bottom 0.254: v66.98,45.56 69.19,47.77 69.19,48.6 71.03,50.44 v72.39,50.44
AD48  (via drill 0.35)
  Top 0.254: 69.85,44.45 69.23,45.07 68.58,45.07 MAINCON5.12 | 69.85,44.45 69.22,45.08 v69.86,45.71 | 69.85,44.45 70.23,44.07 70.23,42.04 68.58,40.39 68.58,39.27 J6.3 | v71.28,49.53 71.28,54.09 U$18.3
  Bottom 0.254: v69.86,45.71 69.86,46.07 71.31,47.52 71.31,49.53 v71.28,49.53
AD49
  Top 0.254: J7.4 69.62,72.54 70.74,73.66 70.74,78.36 69.68,79.42 MAINCON6.8
AD50
  Top 0.254: J7.5 70.66,71.02 70.66,72.83 71.25,73.42 71.25,78.23 72.44,79.42 MAINCON6.7
AD51
  Top 0.254: MAINCON6.6 73.96,78.74 72.39,78.74 71.65,78 71.65,72.74 71.62,72.71 J7.6
AD52
  Top 0.254: J7.7 72.58,71.02 72.58,72.7 72.06,73.22 72.06,76.87 73.31,78.12 MAINCON6.5
AD53
  Top 0.254: J7.8 73.62,72.41 72.47,73.56 72.47,75.98 73.31,76.82 MAINCON6.3
AD54
  Top 0.254: MAINCON6.2 73.31,76.17 72.87,75.73 72.87,74.68 74.87,72.67 74.87,71.23 J7.9
AD55  (via drill 0.35)
  Top 0.254: J7.2 67.66,71.02 67.66,72.81 69.26,74.41 69.26,75.84 68.93,76.17 MAINCON6.13 67.57,76.17 67.23,76.5 67.23,77.18 67.11,77.31 v66.98,77.31 | v72.39,82.19 72.34,82.19 72.09,82.44 72.09,84.88 72.62,85.41 U$21.2
  Bottom 0.254: v66.98,77.31 69.19,79.52 69.19,80.35 71.03,82.19 v72.39,82.19
AD56  (via drill 0.35)
  Top 0.254: 69.85,76.2 69.23,76.82 68.58,76.82 MAINCON6.12 | 69.85,76.2 69.22,76.83 v69.86,77.46 | 69.85,76.2 70.23,75.82 70.23,73.79 68.58,72.14 68.58,71.02 J7.3 | v71.28,81.28 71.28,85.84 U$21.3
  Bottom 0.254: v69.86,77.46 69.86,77.82 71.31,79.27 71.31,81.28 v71.28,81.28
AD57
  Top 0.254: J8.4 40.41,72.54 41.53,73.66 41.53,78.36 40.47,79.42 MAINCON7.8
AD58
  Top 0.254: J8.5 41.45,71.02 41.45,72.83 42.04,73.42 42.04,78.23 43.23,79.42 MAINCON7.7
AD59
  Top 0.254: MAINCON7.6 44.75,78.74 43.18,78.74 42.44,78 42.44,72.74 42.41,72.71 J8.6
AD60
  Top 0.254: J8.7 43.37,71.02 43.37,72.7 42.85,73.22 42.85,76.87 44.1,78.12 MAINCON7.5
AD61
  Top 0.254: J8.8 44.41,72.41 43.26,73.56 43.26,75.98 44.1,76.82 MAINCON7.3
AD62
  Top 0.254: MAINCON7.2 44.1,76.17 43.66,75.73 43.66,74.68 45.66,72.67 45.66,71.23 J8.9
AD63  (via drill 0.35)
  Top 0.254: J8.2 38.45,71.02 38.45,72.81 40.05,74.41 40.05,75.84 39.72,76.17 MAINCON7.13 38.36,76.17 38.02,76.5 38.02,77.18 37.9,77.31 v37.77,77.31 | v43.18,82.19 43.13,82.19 42.88,82.44 42.88,84.88 43.41,85.41 U$24.2
  Bottom 0.254: v37.77,77.31 39.98,79.52 39.98,80.35 41.82,82.19 v43.18,82.19
AD64  (via drill 0.35)
  Top 0.254: 40.64,76.2 40.02,76.82 39.37,76.82 MAINCON7.12 | 40.64,76.2 40.01,76.83 v40.65,77.46 | 40.64,76.2 41.02,75.82 41.02,73.79 39.37,72.14 39.37,71.02 J8.3 | v42.07,81.28 42.07,85.84 U$24.3
  Bottom 0.254: v40.65,77.46 40.65,77.82 42.1,79.27 42.1,81.28 v42.07,81.28
AD65
  Top 0.254: J9.4 11.2,72.54 12.32,73.66 12.32,78.36 11.26,79.42 MAINCON8.8
AD66
  Top 0.254: J9.5 12.24,71.02 12.24,72.83 12.83,73.42 12.83,78.23 14.02,79.42 MAINCON8.7
AD67
  Top 0.254: MAINCON8.6 15.54,78.74 13.97,78.74 13.23,78 13.23,72.74 13.2,72.71 J9.6
AD68
  Top 0.254: J9.7 14.16,71.02 14.16,72.7 13.64,73.22 13.64,76.87 14.89,78.12 MAINCON8.5
AD69
  Top 0.254: J9.8 15.2,72.41 14.05,73.56 14.05,75.98 14.89,76.82 MAINCON8.3
AD70
  Top 0.254: MAINCON8.2 14.89,76.17 14.45,75.73 14.45,74.68 16.45,72.67 16.45,71.23 J9.9
AD71  (via drill 0.35)
  Top 0.254: J9.2 9.24,71.02 9.24,72.81 10.84,74.41 10.84,75.84 10.51,76.17 MAINCON8.13 9.15,76.17 8.81,76.5 8.81,77.18 8.69,77.31 v8.56,77.31 | v13.97,82.19 13.92,82.19 13.67,82.44 13.67,84.88 14.2,85.41 U$27.2
  Bottom 0.254: v8.56,77.31 10.77,79.52 10.77,80.35 12.61,82.19 v13.97,82.19
AD72  (via drill 0.35)
  Top 0.254: 11.43,76.2 10.81,76.82 10.16,76.82 MAINCON8.12 | 11.43,76.2 10.8,76.83 v11.44,77.46 | 11.43,76.2 11.81,75.82 11.81,73.79 10.16,72.14 10.16,71.02 J9.3 | v12.86,81.28 12.86,85.84 U$27.3
  Bottom 0.254: v11.44,77.46 11.44,77.82 12.89,79.27 12.89,81.28 v12.86,81.28
GND  (via drill 0.35)
  Top 0.152: U$2.NC2 61.09,19.05 v60.2,19.05 | U$3.NC2 81.14,8.89 v79.34,8.89 | v77.47,11.43 U$3.1
  Top 2.54: U$2.NC2 U$2.NC1 | U$3.NC1 U$3.NC2
  Bottom 0.152: v60.2,19.05 60.2,17.78 | v79.34,8.89 77.47,8.89 v77.47,11.43 | v77.47,11.43 77.47,12.7 v77.47,11.43
  other vias: 64.77,25.4 64.77,24.13 64.77,22.86 64.77,21.59 64.77,20.32 63.5,20.32 62.23,20.32 60.96,20.32 81.28,19.05 80.01,19.05 78.74,19.05 77.47,24.13 77.47,22.86 77.47,21.59 77.47,20.32 77.47,19.05 61.72,7.11 61.72,5.84 61.72,4.57 61.72,3.3 61.72,2.03 80.77,8.26 80.77,6.99 80.77,5.71 80.77,4.45 80.77,3.17 80.77,1.91 68.33,17.14 69.22,18.29 76.2,16.13 77.47,25.4 61.72,8.38 72.26,16.89
  pour Bottom: 58.42,27.94 58.42,0 83.82,0 83.82,27.94
  pour Top: 58.42,27.94 58.42,0 83.82,0 83.82,27.94
GND1  (via drill 0.35)
  Top 0.152: U$1.NC2 31.89,19.05 v30.99,19.05 | U$5.NC2 51.94,8.89 v50.13,8.89 | v48.26,11.43 U$5.1
  Top 2.54: U$1.NC2 U$1.NC1 | U$5.NC1 U$5.NC2
  Bottom 0.152: v30.99,19.05 30.99,17.78 | v50.13,8.89 48.26,8.89 v48.26,11.43 | v48.26,11.43 48.26,12.7 v48.26,11.43
  other vias: 35.56,25.4 35.56,24.13 35.56,22.86 35.56,21.59 35.56,20.32 34.29,20.32 33.02,20.32 31.75,20.32 52.07,19.05 50.8,19.05 49.53,19.05 48.26,24.13 48.26,22.86 48.26,21.59 48.26,20.32 48.26,19.05 32.51,7.11 32.51,5.84 32.51,4.57 32.51,3.3 32.51,2.03 51.56,8.26 51.56,6.99 51.56,5.71 51.56,4.45 51.56,3.17 51.56,1.91 39.12,17.14 40.01,18.29 46.99,16.13 48.26,25.4 32.51,8.38 43.05,16.89
  pour Bottom: 29.21,27.94 29.21,0 54.61,0 54.61,27.94
  pour Top: 29.21,27.94 29.21,0 54.61,0 54.61,27.94
GND2  (via drill 0.35)
  Top 0.152: U$7.NC2 2.67,19.05 v1.78,19.05 | U$8.NC2 22.73,8.89 v20.92,8.89 | v19.05,11.43 U$8.1
  Top 2.54: U$7.NC2 U$7.NC1 | U$8.NC1 U$8.NC2
  Bottom 0.152: v1.78,19.05 1.78,17.78 | v20.92,8.89 19.05,8.89 v19.05,11.43 | v19.05,11.43 19.05,12.7 v19.05,11.43
  other vias: 6.35,25.4 6.35,24.13 6.35,22.86 6.35,21.59 6.35,20.32 5.08,20.32 3.81,20.32 2.54,20.32 22.86,19.05 21.59,19.05 20.32,19.05 19.05,24.13 19.05,22.86 19.05,21.59 19.05,20.32 19.05,19.05 3.3,7.11 3.3,5.84 3.3,4.57 3.3,3.3 3.3,2.03 22.35,8.26 22.35,6.99 22.35,5.71 22.35,4.45 22.35,3.17 22.35,1.91 9.91,17.14 10.79,18.29 17.78,16.13 19.05,25.4 3.3,8.38 13.84,16.89
  pour Bottom: 0,27.94 0,0 25.4,0 25.4,27.94
  pour Top: 0,27.94 0,0 25.4,0 25.4,27.94
GND3  (via drill 0.35)
  Top 0.152: U$10.NC2 2.67,50.8 v1.78,50.8 | U$11.NC2 22.73,40.64 v20.92,40.64 | v19.05,43.18 U$11.1
  Top 2.54: U$10.NC2 U$10.NC1 | U$11.NC1 U$11.NC2
  Bottom 0.152: v1.78,50.8 1.78,49.53 | v20.92,40.64 19.05,40.64 v19.05,43.18 | v19.05,43.18 19.05,44.45 v19.05,43.18
  other vias: 6.35,57.15 6.35,55.88 6.35,54.61 6.35,53.34 6.35,52.07 5.08,52.07 3.81,52.07 2.54,52.07 22.86,50.8 21.59,50.8 20.32,50.8 19.05,55.88 19.05,54.61 19.05,53.34 19.05,52.07 19.05,50.8 3.3,38.86 3.3,37.59 3.3,36.32 3.3,35.05 3.3,33.78 22.35,40.01 22.35,38.73 22.35,37.47 22.35,36.2 22.35,34.92 22.35,33.66 9.91,48.9 10.79,50.04 17.78,47.88 19.05,57.15 3.3,40.13 13.84,48.64
  pour Bottom: 0,59.69 0,31.75 25.4,31.75 25.4,59.69
  pour Top: 0,59.69 0,31.75 25.4,31.75 25.4,59.69
GND4  (via drill 0.35)
  Top 0.152: U$13.NC2 31.89,50.8 v30.99,50.8 | U$14.NC2 51.94,40.64 v50.13,40.64 | v48.26,43.18 U$14.1
  Top 2.54: U$13.NC2 U$13.NC1 | U$14.NC1 U$14.NC2
  Bottom 0.152: v30.99,50.8 30.99,49.53 | v50.13,40.64 48.26,40.64 v48.26,43.18 | v48.26,43.18 48.26,44.45 v48.26,43.18
  other vias: 35.56,57.15 35.56,55.88 35.56,54.61 35.56,53.34 35.56,52.07 34.29,52.07 33.02,52.07 31.75,52.07 52.07,50.8 50.8,50.8 49.53,50.8 48.26,55.88 48.26,54.61 48.26,53.34 48.26,52.07 48.26,50.8 32.51,38.86 32.51,37.59 32.51,36.32 32.51,35.05 32.51,33.78 51.56,40.01 51.56,38.73 51.56,37.47 51.56,36.2 51.56,34.92 51.56,33.66 39.12,48.9 40.01,50.04 46.99,47.88 48.26,57.15 32.51,40.13 43.05,48.64
  pour Bottom: 29.21,59.69 29.21,31.75 54.61,31.75 54.61,59.69
  pour Top: 29.21,59.69 29.21,31.75 54.61,31.75 54.61,59.69
GND5  (via drill 0.35)
  Top 0.152: U$16.NC2 61.09,50.8 v60.2,50.8 | U$17.NC2 81.14,40.64 v79.34,40.64 | v77.47,43.18 U$17.1
  Top 2.54: U$16.NC2 U$16.NC1 | U$17.NC1 U$17.NC2
  Bottom 0.152: v60.2,50.8 60.2,49.53 | v79.34,40.64 77.47,40.64 v77.47,43.18 | v77.47,43.18 77.47,44.45 v77.47,43.18
  other vias: 64.77,57.15 64.77,55.88 64.77,54.61 64.77,53.34 64.77,52.07 63.5,52.07 62.23,52.07 60.96,52.07 81.28,50.8 80.01,50.8 78.74,50.8 77.47,55.88 77.47,54.61 77.47,53.34 77.47,52.07 77.47,50.8 61.72,38.86 61.72,37.59 61.72,36.32 61.72,35.05 61.72,33.78 80.77,40.01 80.77,38.73 80.77,37.47 80.77,36.2 80.77,34.92 80.77,33.66 68.33,48.9 69.22,50.04 76.2,47.88 77.47,57.15 61.72,40.13 72.26,48.64
  pour Bottom: 58.42,59.69 58.42,31.75 83.82,31.75 83.82,59.69
  pour Top: 58.42,59.69 58.42,31.75 83.82,31.75 83.82,59.69
GND6  (via drill 0.35)
  Top 0.152: U$19.NC2 61.09,82.55 v60.2,82.55 | U$20.NC2 81.14,72.39 v79.34,72.39 | v77.47,74.93 U$20.1
  Top 2.54: U$19.NC2 U$19.NC1 | U$20.NC1 U$20.NC2
  Bottom 0.152: v60.2,82.55 60.2,81.28 | v79.34,72.39 77.47,72.39 v77.47,74.93 | v77.47,74.93 77.47,76.2 v77.47,74.93
  other vias: 64.77,88.9 64.77,87.63 64.77,86.36 64.77,85.09 64.77,83.82 63.5,83.82 62.23,83.82 60.96,83.82 81.28,82.55 80.01,82.55 78.74,82.55 77.47,87.63 77.47,86.36 77.47,85.09 77.47,83.82 77.47,82.55 61.72,70.61 61.72,69.34 61.72,68.07 61.72,66.8 61.72,65.53 80.77,71.75 80.77,70.48 80.77,69.22 80.77,67.94 80.77,66.67 80.77,65.41 68.33,80.64 69.22,81.79 76.2,79.63 77.47,88.9 61.72,71.88 72.26,80.39
  pour Bottom: 58.42,91.44 58.42,63.5 83.82,63.5 83.82,91.44
  pour Top: 58.42,91.44 58.42,63.5 83.82,63.5 83.82,91.44
GND7  (via drill 0.35)
  Top 0.152: U$22.NC2 31.89,82.55 v30.99,82.55 | U$23.NC2 51.94,72.39 v50.13,72.39 | v48.26,74.93 U$23.1
  Top 2.54: U$22.NC2 U$22.NC1 | U$23.NC1 U$23.NC2
  Bottom 0.152: v30.99,82.55 30.99,81.28 | v50.13,72.39 48.26,72.39 v48.26,74.93 | v48.26,74.93 48.26,76.2 v48.26,74.93
  other vias: 35.56,88.9 35.56,87.63 35.56,86.36 35.56,85.09 35.56,83.82 34.29,83.82 33.02,83.82 31.75,83.82 52.07,82.55 50.8,82.55 49.53,82.55 48.26,87.63 48.26,86.36 48.26,85.09 48.26,83.82 48.26,82.55 32.51,70.61 32.51,69.34 32.51,68.07 32.51,66.8 32.51,65.53 51.56,71.75 51.56,70.48 51.56,69.22 51.56,67.94 51.56,66.67 51.56,65.41 39.12,80.64 40.01,81.79 46.99,79.63 48.26,88.9 32.51,71.88 43.05,80.39
  pour Bottom: 29.21,91.44 29.21,63.5 54.61,63.5 54.61,91.44
  pour Top: 29.21,91.44 29.21,63.5 54.61,63.5 54.61,91.44
GND8  (via drill 0.35)
  Top 0.152: U$25.NC2 2.67,82.55 v1.78,82.55 | U$26.NC2 22.73,72.39 v20.92,72.39 | v19.05,74.93 U$26.1
  Top 2.54: U$25.NC2 U$25.NC1 | U$26.NC1 U$26.NC2
  Bottom 0.152: v1.78,82.55 1.78,81.28 | v20.92,72.39 19.05,72.39 v19.05,74.93 | v19.05,74.93 19.05,76.2 v19.05,74.93
  other vias: 6.35,88.9 6.35,87.63 6.35,86.36 6.35,85.09 6.35,83.82 5.08,83.82 3.81,83.82 2.54,83.82 22.86,82.55 21.59,82.55 20.32,82.55 19.05,87.63 19.05,86.36 19.05,85.09 19.05,83.82 19.05,82.55 3.3,70.61 3.3,69.34 3.3,68.07 3.3,66.8 3.3,65.53 22.35,71.75 22.35,70.48 22.35,69.22 22.35,67.94 22.35,66.67 22.35,65.41 9.91,80.64 10.79,81.79 17.78,79.63 19.05,88.9 3.3,71.88 13.84,80.39
  pour Bottom: 0,91.44 0,63.5 25.4,63.5 25.4,91.44
  pour Top: 0,91.44 0,63.5 25.4,63.5 25.4,91.44
N$1  (via drill 3.3)
  other vias: 80.52,24.13
N$2  (via drill 3.3)
  other vias: 61.72,24
N$3  (via drill 0.35)
  Top 0.254: MAINCON1.11 39.08,14.01 39.76,14.01 40.43,14.68 v40.43,15.02 v40.43,15.03 | v40.64,16.58 41.41,17.35 U$6.4
  Bottom 0.254: v40.43,15.03 40.43,16.37 v40.64,16.58
N$4  (via drill 0.35)
  Top 0.254: MAINCON1.4 44.87,13.88 45.38,13.88 45.8,14.3 45.8,16.24 45.63,16.4 45.22,16.4 v43.84,17.78 | v40.64,24.13 40.64,22.91 U$6.5
  Bottom 0.254: v40.64,24.13 40.64,20.98 42.27,19.35 43.45,19.35 43.84,18.96 v43.84,17.78
N$5  (via drill 3.3)
  other vias: 51.31,24.13
N$6  (via drill 3.3)
  other vias: 32.51,24
N$7  (via drill 0.35)
  Top 0.254: MAINCON.11 68.29,14.01 68.97,14.01 69.64,14.68 v69.64,15.02 v69.64,15.03 | v69.85,16.58 70.62,17.35 U$4.4
  Bottom 0.254: v69.64,15.03 69.64,16.37 v69.85,16.58
N$8  (via drill 0.35)
  Top 0.254: MAINCON.4 74.08,13.88 74.59,13.88 75,14.3 75,16.24 74.84,16.4 74.42,16.4 v73.05,17.78 | v69.85,24.13 69.85,22.91 U$4.5
  Bottom 0.254: v69.85,24.13 69.85,20.98 71.48,19.35 72.66,19.35 73.05,18.96 v73.05,17.78
N$9  (via drill 0.35)
  Top 0.254: MAINCON2.11 9.87,14.01 10.55,14.01 11.22,14.68 v11.22,15.02 v11.22,15.03 | v11.43,16.58 12.2,17.35 U$9.4
  Bottom 0.254: v11.22,15.03 11.22,16.37 v11.43,16.58
N$10  (via drill 0.35)
  Top 0.254: MAINCON2.4 15.66,13.88 16.17,13.88 16.59,14.3 16.59,16.24 16.42,16.4 16,16.4 v14.63,17.78 | v11.43,24.13 11.43,22.91 U$9.5
  Bottom 0.254: v11.43,24.13 11.43,20.98 13.06,19.35 14.24,19.35 14.63,18.96 v14.63,17.78
N$11  (via drill 3.3)
  other vias: 22.1,24.13
N$12  (via drill 3.3)
  other vias: 3.3,24
N$13  (via drill 0.35)
  Top 0.254: MAINCON3.11 9.87,45.76 10.55,45.76 11.22,46.43 v11.22,46.77 v11.22,46.78 | v11.43,48.33 12.2,49.1 U$12.4
  Bottom 0.254: v11.22,46.78 11.22,48.12 v11.43,48.33
N$14  (via drill 0.35)
  Top 0.254: MAINCON3.4 15.66,45.63 16.17,45.63 16.59,46.05 16.59,47.99 16.42,48.15 16,48.15 v14.63,49.53 | v11.43,55.88 11.43,54.66 U$12.5
  Bottom 0.254: v11.43,55.88 11.43,52.73 13.06,51.1 14.24,51.1 14.63,50.71 v14.63,49.53
N$15  (via drill 3.3)
  other vias: 22.1,55.88
N$16  (via drill 3.3)
  other vias: 3.3,55.75
N$17  (via drill 0.35)
  Top 0.254: MAINCON4.11 39.08,45.76 39.76,45.76 40.43,46.43 v40.43,46.77 v40.43,46.78 | v40.64,48.33 41.41,49.1 U$15.4
  Bottom 0.254: v40.43,46.78 40.43,48.12 v40.64,48.33
N$18  (via drill 0.35)
  Top 0.254: MAINCON4.4 44.87,45.63 45.38,45.63 45.8,46.05 45.8,47.99 45.63,48.15 45.22,48.15 v43.84,49.53 | v40.64,55.88 40.64,54.66 U$15.5
  Bottom 0.254: v40.64,55.88 40.64,52.73 42.27,51.1 43.45,51.1 43.84,50.71 v43.84,49.53
N$19  (via drill 3.3)
  other vias: 51.31,55.88
N$20  (via drill 3.3)
  other vias: 32.51,55.75
N$21  (via drill 0.35)
  Top 0.254: MAINCON5.11 68.29,45.76 68.97,45.76 69.64,46.43 v69.64,46.77 v69.64,46.78 | v69.85,48.33 70.62,49.1 U$18.4
  Bottom 0.254: v69.64,46.78 69.64,48.12 v69.85,48.33
N$22  (via drill 0.35)
  Top 0.254: MAINCON5.4 74.08,45.63 74.59,45.63 75,46.05 75,47.99 74.84,48.15 74.42,48.15 v73.05,49.53 | v69.85,55.88 69.85,54.66 U$18.5
  Bottom 0.254: v69.85,55.88 69.85,52.73 71.48,51.1 72.66,51.1 73.05,50.71 v73.05,49.53
N$23  (via drill 3.3)
  other vias: 80.52,55.88
N$24  (via drill 3.3)
  other vias: 61.72,55.75
N$25  (via drill 0.35)
  Top 0.254: MAINCON6.11 68.29,77.51 68.97,77.51 69.64,78.18 v69.64,78.52 v69.64,78.53 | v69.85,80.08 70.62,80.85 U$21.4
  Bottom 0.254: v69.64,78.53 69.64,79.87 v69.85,80.08
N$26  (via drill 0.35)
  Top 0.254: MAINCON6.4 74.08,77.38 74.59,77.38 75,77.8 75,79.74 74.84,79.9 74.42,79.9 v73.05,81.28 | v69.85,87.63 69.85,86.41 U$21.5
  Bottom 0.254: v69.85,87.63 69.85,84.48 71.48,82.85 72.66,82.85 73.05,82.46 v73.05,81.28
N$27  (via drill 3.3)
  other vias: 80.52,87.63
N$28  (via drill 3.3)
  other vias: 61.72,87.5
N$29  (via drill 0.35)
  Top 0.254: MAINCON7.11 39.08,77.51 39.76,77.51 40.43,78.18 v40.43,78.52 v40.43,78.53 | v40.64,80.08 41.41,80.85 U$24.4
  Bottom 0.254: v40.43,78.53 40.43,79.87 v40.64,80.08
N$30  (via drill 0.35)
  Top 0.254: MAINCON7.4 44.87,77.38 45.38,77.38 45.8,77.8 45.8,79.74 45.63,79.9 45.22,79.9 v43.84,81.28 | v40.64,87.63 40.64,86.41 U$24.5
  Bottom 0.254: v40.64,87.63 40.64,84.48 42.27,82.85 43.45,82.85 43.84,82.46 v43.84,81.28
N$31  (via drill 3.3)
  other vias: 51.31,87.63
N$32  (via drill 3.3)
  other vias: 32.51,87.5
N$33  (via drill 0.35)
  Top 0.254: MAINCON8.11 9.87,77.51 10.55,77.51 11.22,78.18 v11.22,78.52 v11.22,78.53 | v11.43,80.08 12.2,80.85 U$27.4
  Bottom 0.254: v11.22,78.53 11.22,79.87 v11.43,80.08
N$34  (via drill 0.35)
  Top 0.254: MAINCON8.4 15.66,77.38 16.17,77.38 16.59,77.8 16.59,79.74 16.42,79.9 16,79.9 v14.63,81.28 | v11.43,87.63 11.43,86.41 U$27.5
  Bottom 0.254: v11.43,87.63 11.43,84.48 13.06,82.85 14.24,82.85 14.63,82.46 v14.63,81.28
N$35  (via drill 3.3)
  other vias: 22.1,87.63
N$36  (via drill 3.3)
  other vias: 3.3,87.5
SCL  (via drill 0.35)
  Top 0.254: MAINCON.10 68.1,14.47 U$2.2 64,14.47 v63.5,13.97 | v76.07,14.48 76.08,14.47 U$3.3
  Bottom 0.254: v63.5,13.97 64.32,13.97 66.28,12.01 73.6,12.01 v76.07,14.48
SCL1  (via drill 0.35)
  Top 0.254: MAINCON1.10 38.89,14.47 U$1.2 34.79,14.47 v34.29,13.97 | v46.86,14.48 46.87,14.47 U$5.3
  Bottom 0.254: v34.29,13.97 35.11,13.97 37.07,12.01 44.39,12.01 v46.86,14.48
SCL2  (via drill 0.35)
  Top 0.254: MAINCON2.10 9.68,14.47 U$7.2 5.58,14.47 v5.08,13.97 | v17.65,14.48 17.66,14.47 U$8.3
  Bottom 0.254: v5.08,13.97 5.9,13.97 7.86,12.01 15.18,12.01 v17.65,14.48
SCL3  (via drill 0.35)
  Top 0.254: MAINCON3.10 9.68,46.22 U$10.2 5.58,46.22 v5.08,45.72 | v17.65,46.23 17.66,46.22 U$11.3
  Bottom 0.254: v5.08,45.72 5.9,45.72 7.86,43.76 15.18,43.76 v17.65,46.23
SCL4  (via drill 0.35)
  Top 0.254: MAINCON4.10 38.89,46.22 U$13.2 34.79,46.22 v34.29,45.72 | v46.86,46.23 46.87,46.22 U$14.3
  Bottom 0.254: v34.29,45.72 35.11,45.72 37.07,43.76 44.39,43.76 v46.86,46.23
SCL5  (via drill 0.35)
  Top 0.254: MAINCON5.10 68.1,46.22 U$16.2 64,46.22 v63.5,45.72 | v76.07,46.23 76.08,46.22 U$17.3
  Bottom 0.254: v63.5,45.72 64.32,45.72 66.28,43.76 73.6,43.76 v76.07,46.23
SCL6  (via drill 0.35)
  Top 0.254: MAINCON6.10 68.1,77.97 U$19.2 64,77.97 v63.5,77.47 | v76.07,77.98 76.08,77.97 U$20.3
  Bottom 0.254: v63.5,77.47 64.32,77.47 66.28,75.5 73.6,75.5 v76.07,77.98
SCL7  (via drill 0.35)
  Top 0.254: MAINCON7.10 38.89,77.97 U$22.2 34.79,77.97 v34.29,77.47 | v46.86,77.98 46.87,77.97 U$23.3
  Bottom 0.254: v34.29,77.47 35.11,77.47 37.07,75.5 44.39,75.5 v46.86,77.98
SCL8  (via drill 0.35)
  Top 0.254: MAINCON8.10 9.68,77.97 U$25.2 5.58,77.97 v5.08,77.47 | v17.65,77.98 17.66,77.97 U$26.3
  Bottom 0.254: v5.08,77.47 5.9,77.47 7.86,75.5 15.18,75.5 v17.65,77.98
SDA  (via drill 0.35)
  Top 0.254: v66.04,13.81 65.11,13.81 U$2.3 64.35,13.05 63.98,13.05 63.63,12.7 v63.5,12.7 | v66.04,15.24 66.07,15.27 MAINCON.9 | v76.2,13.57 77.37,13.57 U$3.2
  Bottom 0.254: v66.04,13.81 v66.04,15.24 | v63.5,12.7 64.63,12.7 65.73,11.6 74.23,11.6 v76.2,13.57
SDA1  (via drill 0.35)
  Top 0.254: v36.83,13.81 35.9,13.81 U$1.3 35.14,13.05 34.77,13.05 34.42,12.7 v34.29,12.7 | v36.83,15.24 36.86,15.27 MAINCON1.9 | v46.99,13.57 48.16,13.57 U$5.2
  Bottom 0.254: v36.83,13.81 v36.83,15.24 | v34.29,12.7 35.42,12.7 36.52,11.6 45.02,11.6 v46.99,13.57
SDA2  (via drill 0.35)
  Top 0.254: v7.62,13.81 6.69,13.81 U$7.3 5.93,13.05 5.56,13.05 5.21,12.7 v5.08,12.7 | v7.62,15.24 7.65,15.27 MAINCON2.9 | v17.78,13.57 18.95,13.57 U$8.2
  Bottom 0.254: v7.62,13.81 v7.62,15.24 | v5.08,12.7 6.21,12.7 7.31,11.6 15.81,11.6 v17.78,13.57
SDA3  (via drill 0.35)
  Top 0.254: v7.62,45.56 6.69,45.56 U$10.3 5.93,44.8 5.56,44.8 5.21,44.45 v5.08,44.45 | v7.62,46.99 7.65,47.02 MAINCON3.9 | v17.78,45.32 18.95,45.32 U$11.2
  Bottom 0.254: v7.62,45.56 v7.62,46.99 | v5.08,44.45 6.21,44.45 7.31,43.35 15.81,43.35 v17.78,45.32
SDA4  (via drill 0.35)
  Top 0.254: v36.83,45.56 35.9,45.56 U$13.3 35.14,44.8 34.77,44.8 34.42,44.45 v34.29,44.45 | v36.83,46.99 36.86,47.02 MAINCON4.9 | v46.99,45.32 48.16,45.32 U$14.2
  Bottom 0.254: v36.83,45.56 v36.83,46.99 | v34.29,44.45 35.42,44.45 36.52,43.35 45.02,43.35 v46.99,45.32
SDA5  (via drill 0.35)
  Top 0.254: v66.04,45.56 65.11,45.56 U$16.3 64.35,44.8 63.98,44.8 63.63,44.45 v63.5,44.45 | v66.04,46.99 66.07,47.02 MAINCON5.9 | v76.2,45.32 77.37,45.32 U$17.2
  Bottom 0.254: v66.04,45.56 v66.04,46.99 | v63.5,44.45 64.63,44.45 65.73,43.35 74.23,43.35 v76.2,45.32
SDA6  (via drill 0.35)
  Top 0.254: v66.04,77.31 65.11,77.31 U$19.3 64.35,76.55 63.98,76.55 63.63,76.2 v63.5,76.2 | v66.04,78.74 66.07,78.77 MAINCON6.9 | v76.2,77.07 77.37,77.07 U$20.2
  Bottom 0.254: v66.04,77.31 v66.04,78.74 | v63.5,76.2 64.63,76.2 65.73,75.1 74.23,75.1 v76.2,77.07
SDA7  (via drill 0.35)
  Top 0.254: v36.83,77.31 35.9,77.31 U$22.3 35.14,76.55 34.77,76.55 34.42,76.2 v34.29,76.2 | v36.83,78.74 36.86,78.77 MAINCON7.9 | v46.99,77.07 48.16,77.07 U$23.2
  Bottom 0.254: v36.83,77.31 v36.83,78.74 | v34.29,76.2 35.42,76.2 36.52,75.1 45.02,75.1 v46.99,77.07
SDA8  (via drill 0.35)
  Top 0.254: v7.62,77.31 6.69,77.31 U$25.3 5.93,76.55 5.56,76.55 5.21,76.2 v5.08,76.2 | v7.62,78.74 7.65,78.77 MAINCON8.9 | v17.78,77.07 18.95,77.07 U$26.2
  Bottom 0.254: v7.62,77.31 v7.62,78.74 | v5.08,76.2 6.21,76.2 7.31,75.1 15.81,75.1 v17.78,77.07